# Altium PCB MasterBoardv2.PcbDoc (part 1 of 2)
Units mil, origin at the board's own origin, x right, y up, seen from the top; angles counter-clockwise.
Board outline 13400 x 7290 mil, 2 copper layers (Top Layer, Bottom Layer); 333 components, 276 nets, 860 pads, 107 vias.
Unrouted connection lines stored in the file: 191.
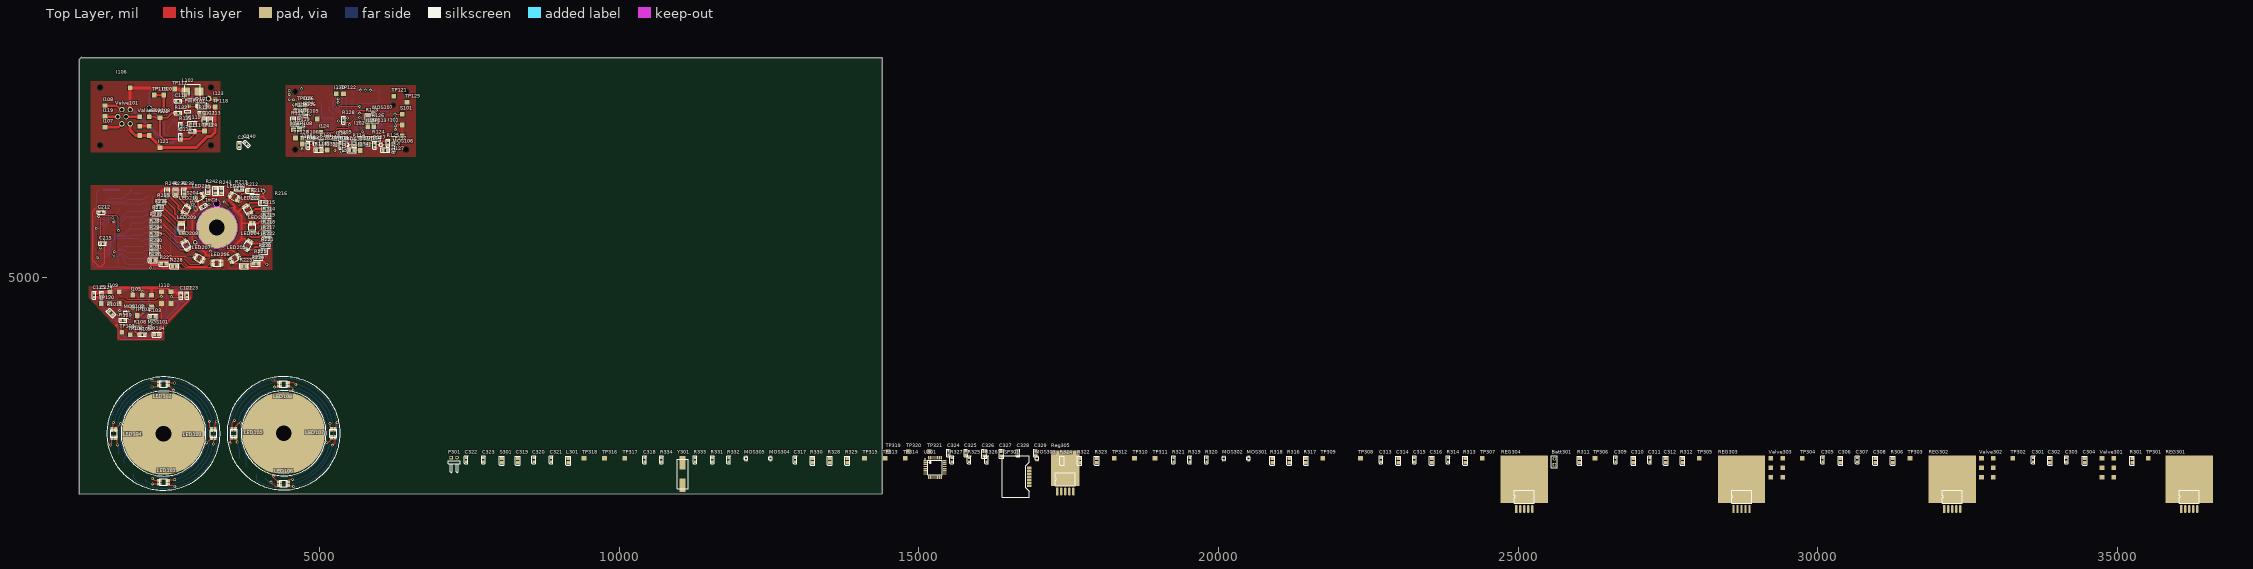
[diagram p0: Top Layer view]
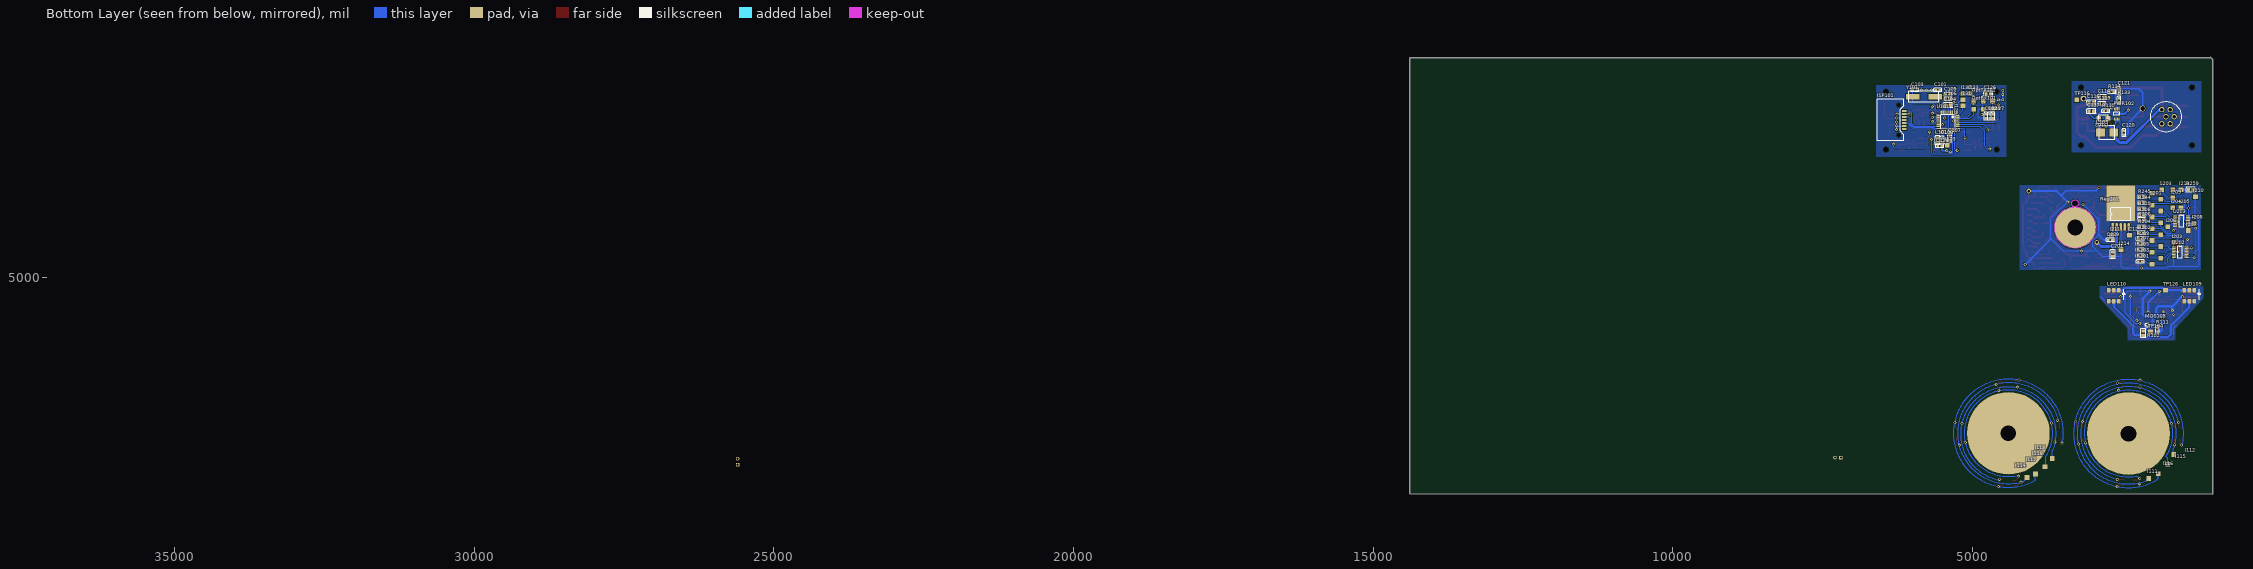
[diagram p1: Bottom Layer view, seen from below]

## Layer stack, top to bottom
Top Layer: signal copper 1.4
Dielectric: dielectric 12.6, FR-4, Dk 4.8
Bottom Layer: signal copper 1.4

## Board outline
990,1380 990,8630 1030,8670 1035,8665 14390,8665 14390,1385

## Design rules (kind name [scope] priority, off if disabled: settings)
Clearance [All] p1: gap=10
ComponentClearance [All] p1 off: gap=10 collisioncheckmode=3 verticalgap=10 showdistances=FALSE
HoleSize [All] p1: absolutevalues=TRUE maxlimit=260 minlimit=1 maxpercent=80.000 minpercent=20.000
MinimumSolderMaskSliver [All] p1: minsoldermaskwidth=2.5
PasteMaskExpansion [All] p1 off: expansion=0
PlaneClearance [All] p1: clearance=39.37
PlaneConnect [All] p1: planeconnectstyle=Relief reliefexpansion=20 reliefentries=4 reliefconductorwidth=10 reliefairgap=20
PolygonConnect [All] p1: connectstyle=Relief reliefconductorwidth=10 reliefentries=4 polygonreliefangle="90 Angle"
RoomDefinition Glasses-LEDBoard [InComponentClass('Glasses-LEDBoard')] p1: confinementstyle=ConfineIn formatcopy=TRUE lockcomponents=FALSE outline 1095,3870 2960,3870 2960,4915 1095,4915
RoomDefinition Glasses-LensBoard [InComponentClass('Glasses-LensBoard')] p2: confinementstyle=ConfineIn formatcopy=TRUE lockcomponents=FALSE outline 1415,1415 5395,1415 5395,3385 1415,3385
RoomDefinition Valve [InComponentClass('Valve')] p3: confinementstyle=ConfineIn formatcopy=TRUE lockcomponents=FALSE outline 14785,9200 17190,9200 17190,9720 14785,9720
RoomDefinition Glasses-PSUBoard [InComponentClass('Glasses-PSUBoard')] p4: confinementstyle=ConfineIn formatcopy=TRUE lockcomponents=FALSE outline 1160,7025 3485,7025 3485,8290 1160,8290
RoomDefinition Glasses [InComponentClass('Glasses')] p5: confinementstyle=ConfineIn formatcopy=TRUE lockcomponents=FALSE outline 4400,6970 6645,6970 6645,8235 4400,8235
RoomDefinition Controller-IOBoard [InComponentClass('Controller-IOBoard')] p6: confinementstyle=ConfineIn formatcopy=TRUE lockcomponents=FALSE outline 1110,5045 4255,5045 4255,6590 1110,6590
RoomDefinition Controller [InComponentClass('Controller')] p7: confinementstyle=ConfineIn formatcopy=TRUE lockcomponents=FALSE outline 7880,3790 11575,3790 11575,7105 7880,7105
RoomDefinition Charger [InComponentClass('Charger')] p8: confinementstyle=ConfineIn formatcopy=TRUE lockcomponents=FALSE outline 7135,1050 36605,1050 36605,2130 7135,2130
RoutingVias [All] p1: holewidth=28 width=50 viastyle="Through Hole" minholewidth=20 minwidth=40 maxholewidth=260 maxwidth=300
SilkToSilkClearance [All] p1 off: silktosilkclearance=10
SilkscreenOverComponentPads [All] p1 off: minsilkscreentomaskgap=10
SolderMaskExpansion [All] p1: expansion=4
Width [All] p1: maxlimit=118.11 minlimit=10 preferedwidth=20
20 further rules are at their usual default settings.

## Classes and differential pairs
component class Charger: Batt301 C301 C302 C303 C304 C305 C306 C307 C308 C309 C310 C311 C312 C313 C314 C315 C316 C317 C318 C319 C320 C321 C322 C323 C324 C325 C326 C327 C328 C329 ISP301 L301 MOS301 MOS302 MOS303 MOS304 MOS305 P301 R301 R306 R311 R312 R313 R314 R316 R317 R318 R319 R320 R321 R322 R323 R324 R325 R326 R327 R328 R329 R330 R331 R332 R333 R334 REG301 REG302 REG303 REG304 Reg305 S301 TP301 TP302 TP303 TP304 TP305 TP306 TP307 TP308 TP309 TP310 TP311 TP312 TP313 TP314 TP315 TP316 TP317 TP318 TP319 TP320 TP321 U301 Valve301 Valve302 Valve303 Y301
component class Controller: Batt201 BT201 C203 C204 C205 C206 C207 C208 C209 C210 C211 C213 C214 C216 C217 C218 C219 C220 C221 C222 C223 C224 C225 C226 C227 C228 C229 C230 C231 C232 C233 C234 C235 C236 C237 C238 C240 C241 C242 C243 D201 EL201 I201 I202 ISP201 L201 L202 L203 L204 MOS201 MOS202 MOS203 MOS204 MOS205 MOS206 Opt_Rx_201 Opt_Tx_201 R246 R247 R248 R249 R250 R251 R252 R253 R254 R255 R256 R257 R258 R260 R261 R262 R263a R263b R264 R265 R266 R267 R268 R269 R270 R271 R272 R273 Reg202 S202 T201 TP209 TP210 TP211 TP212 TP213 TP214 TP215 TP216 TP217 TP218 TP219 TP220 TP221 TP222 TP223 TP224 TP225 TP226 TP227 TP228 U201 U204 U205 U206 U207 Valve201 Valve202 Y201
component class Glasses: C101 C102 C103 C104 C105 C106 C107 C108 C109 C126 C127 C128 I101 I102 I103 I104 I124 I125 I126 I127 I128 I129 I130 I131 I132 I133 I134 I135 I136 I137 I? ISP101 L101 MOS103 MOS104 MOS105 MOS106 MOS107 OptRx101 OptTx101 R105 R106 R107 R112 R113 R114 R115 R116 R118 R119 R120 R121 R122 R123 R124 R125 R126 R127 R128 S101 TP105 TP106 TP107 TP108 TP109 TP110 TP112 TP113 TP114 TP121 TP122 TP123 TP125 U101 Y101
component class Valve: BTValve401 LED401 LED402 Valve401 Valve402
component class Controller-IOBoard: C201 C202 C212 C215 C239 I203 I204 I205 I206 I207 I208 I209 I210 I211 I212 I213 I214 LED201 LED202 LED203 LED204 LED205 LED206 LED207 LED208 LED209 LED210 LED211 R201 R202 R203 R204 R205 R206 R207 R208 R209 R210 R211 R212 R213 R214 R215 R216 R217 R218 R219 R220 R221 R222 R223 R224 R225 R226 R227 R228 R229 R230 R231 R232 R233 R234 R235 R236 R237 R238 R239 R240 R241 R242 R243 R244 R245 R259 Reg201 S201 S203 S204 TP201 TP203 TP204 TP205 TP206 TP207 TP208 U202 U203
component class Glasses-LEDBoard: C122 C123 C124 C125 I105 I109 I110 LED109 LED110 MOS101 MOS102 MOS108 R101 R102 R103 R104 R108 R109 R110 R111 TP101 TP102 TP103 TP104 TP120 TP126
component class Glasses-PSUBoard: C110 C111 C112 C113 C114 C115 C116 C117 C118 C119 C120 C121 D101 D102 I106 I107 I108 I119 I120 I121 I122 I123 L102 L103 PWR101 PWR102 R129 R130 R131 R132 R133 R134 TP116 TP117 TP118 TP119 TP124 Valve101 Valve102 Valve103
component class Glasses-LensBoard: I111 I112 I113 I114 I115 I116 I117 I118 LED101 LED102 LED103 LED104 LED105 LED106 LED107 LED108

## Components (designator, comment, footprint, x,y, rotation, side; value= is the part's Value field where it differs from the comment)
Batt301 "BaseBankSocket" HDR1X2 25605,1870 r90 top
C101 "18pf" 0603 5580,8120 r180 bottom
C102 "100nf" 0603 4775,7685 r270 bottom
C103 "18pf" 0603 5960,8120 r0 bottom
C104 "10uf" 0805 5410,7870 r0 bottom
C105 "1uf" 0603 5410,8050 r0 bottom
C106 "100nf" 0603 5410,7970 r0 bottom
C107 "100nf" 0603 5380,7320 r270 bottom
C108 "100nf" 0603 5505,7285 r90 bottom
C109 "100nf" 0603 4715,7685 r270 bottom
C110 "10uf" 0805 2880,7560 r180 top
C111 "1uf" 0603 2880,7440 r180 top
C112 "10uf" 0805 3080,7600 r90 top
C113 "10uf" 0805 3180,7600 r90 top
C114 "10uf" 0805 2840,8000 r180 bottom
C115 "1uf" 0603 2840,7900 r180 bottom
C116 "10uf" 0805 3015,7910 r0 bottom
C117 "10uf" 0805 3015,7770 r0 bottom
C118 "100nf" 0603 2640,7940 r0 top
C119 "2.2nf" 0603 2680,7340 r90 top
C120 "100nf" 0603 2475,7410 r90 bottom
C121 "2.2nf" 0603 2555,8110 r270 bottom
C122 "1uf" 0603 2690,4695 r90 top
C123 "100nf" 0603 2790,4695 r90 top
C124 "1uf" 0603 1360,4700 r90 top
C125 "100nf" 0603 1240,4700 r90 top
C126 "10uf" 0805 4740,8060 r0 bottom
C127 "1uf" 0603 4655,7685 r270 bottom
C128 "100nf" 0603 5545,7185 r0 bottom
C201 "10uf" 0805 2660,5380 r90 bottom
C202 "1uf" 0603 3060,6180 r210 top
C212 "1uf" 0603 1360,6080 r180 top
C215 "1uf" 0603 1380,5560 r0 top
C239 "100nf" 0603 2700,5620 r0 bottom
C240 "100nf" 0603 3780,7220 r315 top
C241 "10uf" 0603 3660,7200 r270 top
C301 "1uf" 0603 33595,1955 r90 top
C302 "10uf" 0805 33875,1940 r90 top
C303 "1uf" 0603 34150,1955 r90 top
C304 "10uf" 0805 34455,1940 r90 top
C305 "1uf" 0603 30080,1955 r90 top
C306 "10uf" 0805 30380,1940 r90 top
C307 "1uf" 0603 30660,1955 r90 top
C308 "10uf" 0805 30960,1940 r90 top
C309 "1uf" 0603 26625,1955 r90 top
C310 "10uf" 0805 26925,1940 r90 top
C311 "1uf" 0603 27195,1955 r90 top
C312 "10uf" 0805 27465,1940 r90 top
C313 "1uf" 0603 22710,1955 r90 top
C314 "10uf" 0805 23000,1940 r90 top
C315 "1uf" 0603 23270,1955 r90 top
C316 "10uf" 0805 23560,1940 r90 top
C317 "18pf" 0603 12935,1955 r90 top
C318 "18pf" 0603 10425,1955 r90 top
C319 "10uf" 0805 8310,1940 r90 top
C320 "1uf" 0603 8575,1955 r90 top
C321 "100nf" 0603 8865,1955 r90 top
C322 "100nf" 0603 7445,1955 r90 top
C323 "100nf" 0603 7735,1955 r90 top
C324 "100nf" 0603 15495,2065 r90 top
C325 "1uf" 0603 15785,2065 r90 top
C326 "10uf" 0805 16090,2050 r90 top
C327 "10uf" 0805 16380,2050 r90 top
C328 "1uf" 0603 16655,2065 r90 top
C329 "100nf" 0603 16945,2065 r90 top
D101 "Diode BYG20D" BYG20J-E3 3120,7860 r180 top
D102 "Diode BYG20D" BYG20J-E3 2895,7650 r180 bottom
I101 "TestPoint" TestPoint 6380,7360 r90 top
I102 "TestPoint" TestPoint 5810,7315 r90 top
I103 "TestPoint" TestPoint 5420,7200 r90 bottom
I104 "TestPoint" TestPoint 4960,7640 r90 top
I105 "LensesPCBA" "Valve male" 2040,4500 r0 top
I106 "TestPoint" TestPoint 1840,8160 r90 top
I107 "TestPoint" TestPoint 1420,7500 r0 top
I108 "TestPoint" TestPoint 1420,7860 r0 top
I109 "Lenses PCB Left" "4-Pin Pad" 1660,4560 r0 top
I110 "Lenses PCB Right" "4-Pin Pad" 2520,4560 r0 top
I111 "TestPoint" TestPoint 2060,1640 r90 bottom
I112 "TestPoint" TestPoint 1640,2040 r90 bottom
I113 "TestPoint" TestPoint 3670,1975 r270 bottom
I114 "TestPoint" TestPoint 4090,1655 r270 bottom
I115 "TestPoint" TestPoint 1740,1880 r90 bottom
I116 "TestPoint" TestPoint 1900,1720 r90 bottom
I117 "TestPoint" TestPoint 3950,1715 r270 bottom
I118 "TestPoint" TestPoint 3790,1835 r270 bottom
I119 "TestPoint" TestPoint 1420,7680 r0 top
I120 "TestPoint" TestPoint 2400,8040 r90 top
I121 "TestPoint" TestPoint 2340,7160 r90 top
I122 "TestPoint" TestPoint 2340,7660 r90 top
I123 "TestPoint" TestPoint 3260,7960 r90 top
I124 "TestPoint" TestPoint 5020,7420 r0 top
I125 "TestPoint" TestPoint 4710,7320 r0 top
I126 "TestPoint" TestPoint 4765,7880 r270 top
I127 "TestPoint" TestPoint 6240,7120 r0 top
I128 "TestPoint" TestPoint 5805,7510 r90 top
I129 "TestPoint" TestPoint 5160,7860 r180 bottom
I130 "TestPoint" TestPoint 5280,8060 r0 top
I131 "TestPoint" TestPoint 5160,7960 r180 bottom
I132 "TestPoint" TestPoint 5160,8060 r180 bottom
I133 "TestPoint" TestPoint 5040,8060 r180 bottom
I134 "TestPoint" TestPoint 5680,7115 r0 top
I135 "TestPoint" TestPoint 5130,7120 r0 top
I136 "TestPoint" TestPoint 5260,7315 r0 top
I137 "TestPoint" TestPoint 4565,7460 r270 top
I203 "TestPoint" TestPoint 1640,5580 r270 bottom
I204 "TestPoint" TestPoint 1660,6160 r270 bottom
I205 "TestPoint" TestPoint 1520,6160 r90 bottom
I206 "TestPoint" TestPoint 1740,5840 r90 bottom
I207 "TestPoint" TestPoint 1400,5780 r90 bottom
I208 "TestPoint" TestPoint 1300,5900 r90 bottom
I209 "TestPoint" TestPoint 1660,6320 r90 bottom
I210 "TestPoint" TestPoint 1280,6340 r90 bottom
I211 "TestPoint" TestPoint 2680,5700 r90 bottom
I212 "TestPoint" TestPoint 2380,5700 r90 bottom
I213 "TestPoint" TestPoint 1520,6460 r90 bottom
I214 "TestPoint" TestPoint 2520,5460 r90 bottom
ISP101 "SATA" SATA 6140,7620 r90 bottom
ISP301 "SATA" SATA 16845,1670 r90 top
L101 "10uH" 0805 5585,7285 r270 bottom
L102 "ELL-6PG4R7N" ELL6PG4R7N-2CHK 2880,8100 r0 top
L103 "ELL-6PG4R7N" ELL6PG4R7N-2CHK 2755,7410 r0 bottom
L301 "10uH" 0805 9150,1940 r90 top
LED101 "Tri LED" CLV1A-FKB 2396.34,1580 r0 top
LED102 "Tri LED" CLV1A-FKB 2396.34,3220 r180 top
LED103 "Tri LED" CLV1A-FKB 3230,2390 r90 top
LED104 "Tri LED" CLV1A-FKB 1570,2390 r270 top
LED105 "Tri LED" CLV1A-FKB 3570,2395 r90 top
LED106 "Tri LED" CLV1A-FKB 4401.34,1555 r180 top
LED107 "Tri LED" CLV1A-FKB 5230,2395 r270 top
LED108 "Tri LED" CLV1A-FKB 4401.34,3215 r0 top
LED109 "LED_head" "LED Headlamp" 1385,4690 r270 bottom
LED110 "LED_head" "LED Headlamp" 2645,4690 r270 bottom
LED201 "Tri LED" CLV1A-FKB 3580,6340 r330 top
LED202 "Tri LED" CLV1A-FKB 3799.21,6122.05 r300 top
LED203 "Tri LED" CLV1A-FKB 3877.95,5826.77 r270 top
LED204 "Tri LED" CLV1A-FKB 3799.21,5531.5 r240 top
LED205 "Tri LED" CLV1A-FKB 3582.68,5314.96 r210 top
LED206 "Tri LED" CLV1A-FKB 3287.4,5236.22 r180 top
LED207 "Tri LED" CLV1A-FKB 2992.13,5314.96 r150 top
LED208 "Tri LED" CLV1A-FKB 2775.59,5531.5 r120 top
LED209 "Tri LED" CLV1A-FKB 2696.85,5826.77 r90 top
LED210 "Tri LED" CLV1A-FKB 2775.59,6122.05 r60 top
LED211 "Tri LED" CLV1A-FKB 2992.13,6338.58 r30 top
MOS101 "EM6K7T2RCT-ND" EM6K7T2R-EMT6 2140,4180 r0 top
MOS102 "EM6K7T2RCT-ND" EM6K7T2R-EMT6 1780,4440 r270 top
MOS103 "EM6K7T2RCT-ND" EM6K7T2R-EMT6 4890,7240 r0 top
MOS104 "EM6K7T2RCT-ND" EM6K7T2R-EMT6 5500,7195 r180 top
MOS105 "EM6K7T2RCT-ND" EM6K7T2R-EMT6 4685,7700 r270 top
MOS106 "EM6K7T2RCT-ND" EM6K7T2R-EMT6 5990,7235 r0 top
MOS107 "EM6K7T2RCT-ND" EM6K7T2R-EMT6 5885,7690 r90 top
MOS108 "EM6K7T2RCT-ND" EM6K7T2R-EMT6 2110,4165 r90 bottom
MOS301 "EM6K7T2RCT-ND" EM6K7T2R-EMT6 20480,1940 r90 top
MOS302 "EM6K7T2RCT-ND" EM6K7T2R-EMT6 20070,1940 r90 top
MOS303 "EM6K7T2RCT-ND" EM6K7T2R-EMT6 16950,1940 r90 top
MOS304 "EM6K7T2RCT-ND" EM6K7T2R-EMT6 12505,1940 r90 top
MOS305 "EM6K7T2RCT-ND" EM6K7T2R-EMT6 12095,1940 r90 top
OptRx101 "TORX177" "Optical RX" 4980,7800 r180 bottom
OptTx101 "LTDL-TX12P03" "Optical TX" 4980,7940 r180 bottom
P301 "9VDC Input" HDR1X2H 7195,1990 r0 top
PWR101 "TPS61085PWR" TPS61085-MSOP8 2760,7680 r90 top
PWR102 "TPS61085PWR" TPS61085-MSOP8 2555,7810 r270 bottom
R101 "Res3" 0805 1520,4400 r315 top
R102 "Res3" 0805 2150,4065 r270 bottom
R103 "Res3" 0805 2220,4340 r180 top
R104 "Res3" 0805 2280,4040 r180 top
R105 "Res3" 0805 5400,7315 r0 top
R106 "Res3" 0805 4850,7320 r0 top
R107 "Res3" 0805 5540,7115 r180 top
R108 "10k" 0603 1960,4160 r0 top
R109 "10k" 0603 2040,4040 r0 top
R110 "10k" 0603 1720,4280 r180 top
R111 "10k" 0603 1910,4125 r90 bottom
R112 "10k" 0603 5360,7195 r90 top
R113 "10k" 0603 4810,7200 r90 top
R114 "10k" 0603 5580,7235 r270 top
R115 "Res3" 0805 4560,7600 r90 top
R116 "Res3" 0805 4765,7740 r270 top
R118 "Res3" 0805 4990,7120 r180 top
R119 "10k" 0603 4685,7540 r180 top
R120 "10k" 0603 4645,7780 r0 top
R121 "10k" 0603 5030,7240 r270 top
R122 "Res3" 0805 6100,7120 r180 top
R123 "Res3" 0805 5805,7650 r90 top
R124 "Res3" 0805 5950,7315 r0 top
R125 "10k" 0603 6140,7240 r270 top
R126 "10k" 0603 5925,7610 r180 top
R127 "10k" 0603 5920,7200 r90 top
R128 "10k" 0603 5400,7620 r90 top
R129 "54.9k" 0603 3040,7740 r0 top
R130 "54.9k" 0603 2775,7770 r0 bottom
R131 "22K" 0603 2680,7520 r90 top
R132 "18K" 0603 2640,7740 r0 top
R133 "22k" 0603 2555,7950 r270 bottom
R134 "18k" 0603 2675,8090 r180 bottom
R201 "10k" 0603 2200,5260 r0 bottom
R202 "10k" 0603 2180,5740 r180 bottom
R203 "10k" 0603 2200,5360 r0 bottom
R204 "10k" 0603 2180,5840 r180 bottom
R205 "10k" 0603 2200,5460 r0 bottom
R206 "10k" 0603 2180,5960 r180 bottom
R207 "10k" 0603 2200,5560 r0 bottom
R208 "10k" 0603 2180,6040 r180 bottom
R209 "10k" 0603 2200,5640 r0 bottom
R210 "10k" 0603 2180,6140 r180 bottom
R211 "Res1" 0805 3920,6340 r180 top
R212 "Res1" 0805 3840,6440 r180 top
R213 "Res1" 0805 3660,6480 r180 top
R214 "Res1" 0805 4120,6035 r180 top
R215 "Res1" 0805 4120,6137.5 r180 top
R216 "Res1" 0805 4060,6240 r180 top
R217 "Res1" 0805 4120,5720 r180 top
R218 "Res1" 0805 4120,5820 r180 top
R219 "Res1" 0805 4120,5932.5 r180 top
R220 "Res1" 0805 4060,5420 r180 top
R221 "Res1" 0805 4100,5520 r180 top
R222 "Res1" 0805 4120,5625 r180 top
R223 "Res1" 0805 3740,5180 r180 top
R224 "Res1" 0805 3940,5220 r180 top
R225 "Res1" 0805 3980,5320 r180 top
R226 "Res1" 0805 2220,5280 r0 top
R227 "Res1" 0805 2400,5220 r0 top
R228 "Res1" 0805 2580,5180 r0 top
R229 "Res1" 0805 2240,5617.5 r0 top
R230 "Res1" 0805 2240,5508.75 r0 top
R231 "Res1" 0805 2240,5400 r0 top
R232 "Res1" 0805 2240,5943.75 r0 top
R233 "Res1" 0805 2240,5835 r0 top
R234 "Res1" 0805 2240,5726.25 r0 top
R235 "Res1" 0805 2360,6260 r0 top
R236 "Res1" 0805 2320,6160 r0 top
R237 "Res1" 0805 2280,6060 r0 top
R238 "Res1" 0805 2740,6420 r270 top
R239 "Res1" 0805 2600,6420 r270 top
R240 "Res1" 0805 2460,6420 r270 top
R241 "Res1" 0805 3260,6440 r270 top
R242 "Res1" 0805 3140,6460 r270 top
R243 "Res1" 0805 3360,6440 r270 top
R244 "10k" 0603 2180,6240 r180 bottom
R245 "10k" 0603 2180,6340 r0 bottom
R259 "Res1" 0805 1360,6460 r180 bottom
R301 "3R" 0805 35245,1940 r90 top
R306 "3R" 0805 31250,1940 r90 top
R311 "Res3" 0805 26025,1940 r90 top
R312 "3R" 0805 27745,1940 r90 top
R313 "Res3" 0805 24120,1940 r90 top
R314 "3R" 0603 23830,1955 r90 top
R316 "Res3" 0805 21180,1940 r90 top
R317 "Res3" 0805 21460,1940 r90 top
R318 "Res3" 0805 20900,1940 r90 top
R319 "10k" 0603 19520,1955 r90 top
R320 "10k" 0603 19800,1955 r90 top
R321 "10k" 0603 19250,1955 r90 top
R322 "Res3" 0805 17680,1940 r90 top
R323 "Res3" 0805 17970,1940 r90 top
R324 "Res3" 0805 17390,1940 r90 top
R325 "10k" 0603 15840,1955 r90 top
R326 "10k" 0603 16130,1955 r90 top
R327 "10k" 0603 15550,1955 r90 top
R328 "Res3" 0805 13515,1940 r90 top
R329 "Res3" 0805 13805,1940 r90 top
R330 "Res3" 0805 13225,1940 r90 top
R331 "10k" 0603 11555,1955 r90 top
R332 "10k" 0603 11825,1955 r90 top
R333 "10k" 0603 11265,1955 r90 top
R334 "10k" 0603 10705,1955 r90 top
Reg201 "Reg104-5" REG104-5-DDPAK5 2660,5840 r90 bottom
REG301 "TPS7A4501DCQR" TPS7A4501KTTR-5DDPAK 36065,1130 r90 top
REG302 "TPS7A4501DCQR" TPS7A4501KTTR-5DDPAK 32110,1130 r90 top
REG303 "TPS7A4501DCQR" TPS7A4501KTTR-5DDPAK 28595,1130 r90 top
REG304 "TPS7A4501KTTR" TPS7A4501KTTR-5DDPAK 24970,1130 r90 top
Reg305 "Reg104-5" REG104-5-DDPAK5 17310,1420 r90 top
S101 "SW-PB" "2 pin switch (surface mount)" 6380,7720 r270 top
S201 "SW-12WAY" "switch pad layout" 1860,6300 r0 bottom
S203 "SW-SPST" "2 pin switch (surface mount)" 1840,6460 r180 bottom
S204 "SW-12WAY" "12 pole switch" 3287.4,5826.77 r0 top
S301 "SW-PB" 0805 8040,1940 r90 top
TP101 "TestPoint" TestPoint 1960,4360 r90 top
TP102 "TestPoint" TestPoint 1840,4040 r90 top
TP103 "TestPoint" TestPoint 1700,4080 r90 top
TP104 "TestPoint" TestPoint 2030,4085 r270 bottom
TP105 "TestPoint" TestPoint 5260,7215 r90 top
TP106 "TestPoint" TestPoint 4710,7220 r90 top
TP107 "TestPoint" TestPoint 5680,7215 r90 top
TP108 "TestPoint" TestPoint 4665,7460 r0 top
TP109 "TestPoint" TestPoint 4665,7880 r0 top
TP110 "TestPoint" TestPoint 5130,7235 r90 top
TP112 "TestPoint" TestPoint 6240,7220 r90 top
TP113 "TestPoint" TestPoint 5905,7510 r180 top
TP114 "TestPoint" TestPoint 5810,7215 r90 top
TP116 "TestPoint" TestPoint 3260,7960 r90 bottom
TP117 "TestPoint" TestPoint 2580,8140 r90 top
TP118 "TestPoint" TestPoint 3260,7840 r90 top
TP119 "TestPoint" TestPoint 2240,8040 r90 top
TP120 "TestPoint" TestPoint 1360,4560 r90 top
TP121 "TestPoint" TestPoint 6240,8020 r90 top
TP122 "TestPoint" TestPoint 5400,8060 r90 top
TP123 "TestPoint" TestPoint 4600,7320 r90 top
TP124 "TestPoint" TestPoint 3080,7440 r90 top
TP125 "TestPoint" TestPoint 6460,7920 r90 top
TP126 "TestPoint" TestPoint 1780,4782.52 r90 bottom
TP301 "TestPoint" TestPoint 35515,1980 r90 top
TP302 "TestPoint" TestPoint 33255,1980 r90 top
TP303 "TestPoint" TestPoint 31540,1980 r90 top
TP304 "TestPoint" TestPoint 29740,1980 r90 top
TP305 "TestPoint" TestPoint 28025,1980 r90 top
TP306 "TestPoint" TestPoint 26285,1980 r90 top
TP307 "TestPoint" TestPoint 24400,1980 r90 top
TP308 "TestPoint" TestPoint 22370,1980 r90 top
TP309 "TestPoint" TestPoint 21740,1980 r90 top
TP310 "TestPoint" TestPoint 18600,1980 r90 top
TP311 "TestPoint" TestPoint 18940,1980 r90 top
TP312 "TestPoint" TestPoint 18260,1980 r90 top
TP313 "TestPoint" TestPoint 14435,1980 r90 top
TP314 "TestPoint" TestPoint 14775,1980 r90 top
TP315 "TestPoint" TestPoint 14095,1980 r90 top
TP316 "TestPoint" TestPoint 9755,1980 r90 top
TP317 "TestPoint" TestPoint 10095,1980 r90 top
TP318 "TestPoint" TestPoint 9415,1980 r90 top
TP319 "TestPoint" TestPoint 14485,2090 r90 top
TP320 "TestPoint" TestPoint 14825,2090 r90 top
TP321 "TestPoint" TestPoint 15175,2090 r90 top
U101 "ATmega8L-8AI" ATMega_GOOD 5410,7590 r270 bottom
U202 "FSAL200" FSAL200-16QSOP 1640,5500 r180 bottom
U203 "FSAL200" FSAL200-16QSOP 1620,6020 r180 bottom
U301 "ATmega8L-8AI" ATMega_GOOD 15270,1825 r0 top
Valve101 "Valve_pcb connector" "Valve_pcb mount" 1771.65,7677.17 r90 top
Valve102 "Header 3H" "Valve_3 pin" 2000,7520 r270 top
Valve103 "Header 3H" "Valve_3 pin" 2160,7520 r270 top
Valve301 "6+SHIELD DIN" "Valve male" 34940,1820 r90 top
Valve302 "6+SHIELD DIN" "Valve male" 32930,1820 r90 top
Valve303 "6+SHIELD DIN" "Valve male" 29415,1820 r90 top
Y101 "XTAL" ABLS-16MHz-B4-T 5810,8010 r0 bottom
Y301 "XTAL" ABLS-16MHz-B4-T 11060,1715 r90 top

## Footprints (in the part's own frame and the unit in brackets; to place one, negate y for a bottom-side part, rotate by r counter-clockwise, add the part's x,y. Pads: shape width x height; smd on the part's side, far side on the other; paste and mask are expansions set on the pad)
"2 pin switch (surface mount)" [mm]
  rect 2x2 smd: 1(0,0) 2(4.6,0)
"4-Pin Pad" [mm]
  rect 2x2 smd: 1(-4,5) 2(0,5) 3(-4,0) 4(0,0)
"12 pole switch" [mm] "rotary switch"
  round 17.5 hole 6.604 unplated: 0(0,0.05)
  round 3.175 hole 3.175 unplated: 0(0,10.25)
  Keep-Out Layer circle w0.254: c0,10.25 r1.5
  Keep-Out Layer circle w0.254: c0,0 r8.75
0603 [mm] "generic 0603 Cap/Res"
  rect 1.1x1 smd: 1(-0.85,0) 2(0.85,0)
  silkscreen extent -1.65,-0.76 1.65,0.76
0805 [mm] "generic 0805 Cap/Res"
  rect 1.3x1.5 smd: 1(-0.95,0) 2(0.95,0)
  silkscreen extent -1.91,-1.02 1.91,1.02
ABLS-16MHz-B4-T [mm] "Abracon ABLS Series 16MHz 18pF Crystal"
  rect 5.8x2.5 smd: 1(-4.75,0) 2(4.75,0)
  silkscreen extent -6.35,-2.35 6.35,2.35
ATMega_GOOD [mm]
  oval 1.5x0.5 smd: 1(-4.15,2.8) 2(-4.15,2) 3(-4.15,1.2) 4(-4.15,0.4) 5(-4.15,-0.4) 6(-4.15,-1.2) 7(-4.15,-2) 8(-4.15,-2.8) 17(4.15,-2.8) 18(4.15,-2) 19(4.15,-1.2) 20(4.15,-0.4) 21(4.15,0.4) 22(4.15,1.2) 23(4.15,2) 24(4.15,2.8)
  oval 0.5x1.5 smd: 9(-2.8,-4.15) 10(-2,-4.15) 11(-1.2,-4.15) 12(-0.4,-4.15) 13(0.4,-4.15) 14(1.2,-4.15) 15(2,-4.15) 16(2.8,-4.15) 25(2.8,4.15) 26(2,4.15) 27(1.2,4.15) 28(0.4,4.15) 29(-0.4,4.15) 30(-1.2,4.15) 31(-2,4.15) 32(-2.8,4.15)
  silkscreen extent -4.27,-3.05 3.05,3.75, body extent -3.5,-3.5 3.5,3.5, height 1.2
BYG20J-E3 [mm]
  rrect50% 2x2 smd: 1(0,0)
  rect 2x2 smd: 3(4,0)
  silkscreen extent -0.04,-1.25 4,1.6
CLV1A-FKB [mm] "Cree RGB SMD LED"
  rrect50% 2x1.3 smd: 1(-1.75,0.75)
  rect 2x1.3 smd: 2(-1.75,-0.75) 3(1.75,-0.75) 4(1.75,0.75)
  silkscreen extent -1.6,-1.4 1.6,1.4
ELL6PG4R7N-2CHK [mm] "Panasonic ELL-6UH100M Inductor 10uH"
  rect 3.8x3.4 smd: 1(-2.85,0) 2(2.85,0)
  silkscreen extent -3.2,-3 3.2,3
EM6K7T2R-EMT6 [mil] "Rohm Dual Channel NMOS"
  rect 27.56x10 smd mask+0: 1(0,0)
  oval 27.56x10 smd mask+0: 2(0,-20) 3(0,-40) 4(66.93,-40) 5(66.93,-20) 6(66.93,0)
  silkscreen extent 12,-49 59,10
FSAL200-16QSOP [mm]
  rect 1.7x0.317 smd: 1(0,0)
  oval 1.7x0.317 smd: 2(0,-0.635) 3(0,-1.27) 4(0,-1.905) 5(0,-2.54) 6(0,-3.175) 7(0,-3.81) 8(0,-4.445) 9(5.4,-4.445) 10(5.4,-3.81) 11(5.4,-3.175) 12(5.4,-2.54) 13(5.4,-1.905) 14(5.4,-1.27) 15(5.4,-0.635) 16(5.4,0)
  silkscreen extent 1.73,-4.76 3.67,0.32
HDR1X2 [mm] "Connector; Header; 2 Position"
  rect 1.5x1.5 hole 0.9: 1(0,0)
  round 1.5 hole 0.9: 2(2.54,0)
  silkscreen extent -1.27,-1.27 3.81,1.27
HDR1X2H [mm] "Connector; Header; 2 Position; Right Angle"
  rect 1.5x1.5 hole 0.9: 1(0,0)
  round 1.5 hole 0.9: 2(2.54,0)
  silkscreen extent -1.27,-6.35 3.81,-1.27
"LED Headlamp" [mm]
  rect 2x1.5 smd: 1(-2.35,-2.1) 1(-2.35,0) 1(-2.35,2.1) 2(2.35,-2.1) 2(2.35,0) 2(2.35,2.1)
  silkscreen extent -2.67,3.68 1.65,4.83
"Optical RX" [mm]
  rect 2x2 smd: 1(0,0) 2(4,0) 3(8,0)
"Optical TX" [mm]
  rect 2x2 smd: 1(0,0) 2(4,0) 3(8,0)
REG104-5-DDPAK5 [mm]
  rect 3.4x1 smd: 1(0,0)
  oval 3.4x1 smd: 2(0,-1.7) 3(0,-3.4) 4(0,-5.1) 5(0,-6.8)
  rect 15x12 smd: 6(10,-3.4)
  silkscreen extent 2.53,-7.65 8.07,0.85
SATA [mm]
  round 0 hole 1.524 unplated: 0(-6.375,2.362) 0(6.375,2.362)
  rect 0.9x2 smd: 1(3.81,0) 2(2.54,0) 3(1.27,0) 4(0,0) 5(-1.27,0) 6(-2.54,0) 7(-3.81,0)
  silkscreen extent -8.8,0.1 8.8,11.5
"switch pad layout" [mm]
  rect 2x2 smd: 1(3.7,27.5) 2(0,25) 3(3.7,22.5) 5(0,20) 6(3.7,17.5) 7(0,15) 8(3.7,12.5) 9(0,10) 10(3.7,7.5) 11(0,5) 12(3.7,2.5) 13(0,0) 14(3.7,-2.5)
TestPoint [mm]
  rect 2x2 smd: 1(0,0)
TPS7A4501KTTR-5DDPAK [mm]
  rect 3.4x1 smd: 1(0,0)
  oval 3.4x1 smd: 2(0,-1.7) 3(0,-3.4) 4(0,-5.1) 5(0,-6.8)
  rect 20x20 smd: 6(12.6,-3.4)
  silkscreen extent 2.53,-7.65 8.07,0.85
TPS61085-MSOP8 [mm] "Ti Step-Up DCDC Converter - MSOP 8 Pin Package"
  rect 1.4x0.38 smd: 1(0,0)
  oval 1.4x0.38 smd: 2(0,-0.65) 3(0,-1.3) 4(0,-1.95) 5(4.35,-1.95) 6(4.35,-1.3) 7(4.35,-0.65) 8(4.35,0)
  silkscreen extent 1.58,-2.28 2.77,0.33
"Valve male" [mm]
  rect 2x2 smd: 1(-4,5) 2(-4,0) 3(0,5) 4(0,0) 5(4,5) 6(4,0)
"Valve_3 pin" [mm] "3 pin connector for half a valve connection"
  rect 2x2 smd: 1(-4,0) 2(0,0) 3(4,0)
"Valve_pcb mount" [mil] "pcb foot print for valve connector mounting"
  round 90 hole 60: 1(-119.29,68.9) 2(-119.29,-68.9) 3(0,137.8) 4(0,0) 5(119.29,68.9) 6(119.29,-68.9)

## Part data
Batt301: library part "Header 2", "Header, 2-Pin"
C101 C102 C103 C104 C105 C106 C107 C108 C109 C110 C111 C112 C113 C114 C115 C116 C117 C118 C119 C120 C121 C122 C123 C124 C125 C126 C127 C128 C201 C202 C212 C215 C239 C240 C241 C301 C302 C303 C304 C305 C306 C307 C308 C309 C310 C311 C312 C313 C314 C315 C316 C317 C318 C319 C320 C321 C322 C323 C324 C325 C326 C327 C328 C329: library part "Cap Semi", "Capacitor (Semiconductor SIM Model)"
D101 D102: library part "Diode 10TQ035", "Schottky Rectifier"
I105 Valve301 Valve302 Valve303: library part "Header 3X2A", "Header, 3-Pin, Dual row"
I109 I110: library part "Header 2X2", "Header, 2-Pin, Dual row"
ISP101 ISP301: library part "Header 3X2", "Header, 3-Pin, Dual row"
L101 L102 L103 L301: library part Inductor, "Inductor"
LED109 LED110: library part LED0, "Typical INFRARED GaAs LED"
OptRx101: "Optical receiver module"
OptTx101: "Optical transmitter"
P301: library part "Header 2H", "Header, 2-Pin, Right Angle"
R101 R102 R103 R104 R105 R106 R107 R115 R116 R118 R122 R123 R124 R211 R212 R213 R214 R215 R216 R217 R218 R219 R220 R221 R222 R223 R224 R225 R226 R227 R228 R229 R230 R231 R232 R233 R234 R235 R236 R237 R238 R239 R240 R241 R242 R243 R259 R311 R313 R316 R317 R318 R322 R323 R324 R328 R329 R330: "Resistor"
R108 R109 R110 R111 R112 R113 R114 R119 R120 R121 R125 R126 R127 R128 R201 R202 R203 R204 R205 R206 R207 R208 R209 R210 R244 R245 R319 R320 R321 R325 R326 R327 R331 R332 R333 R334: library part Res3, "Resistor"
R129 R130 R131 R132 R133 R134 R301 R306 R312 R314: library part Res1, "Resistor"
REG301 REG302 REG303: library part TPS7A4515
REG304: library part TPS7A4501
S101 S301: "Switch"
S201 S204: "12 Way Switch"
S203: "Single-Pole, Single-Throw Switch"
U101 U301: "8-Bit AVR Microcontroller with 8K Bytes of In-System Programmable Flash Memory"
U202 U203: "ST Quad Bi-Directional Logic Switch"
Valve101: library part "Header 3X2H", "Header, 3-Pin, Dual row, Right Angle"
Valve102 Valve103: "Header, 3-Pin, Right Angle"
Y101 Y301: "Crystal Oscillator"

## Free pads (board coordinates)
  round 60 hole 80 unplated: 0(1338.58,7199.09) 0(1338.58,8165.24) 0(3188.98,7199.09) 0(3188.98,8165.24) 0(4593.58,7129.09) 0(4593.58,8095.24) 0(6443.98,7129.09) 0(6443.98,8095.24)
  round 1377.95 hole 260: 0(2396.34,2390) 0(4401.34,2395)

## Via types
v1: diameter 50, hole 28, Top Layer to Bottom Layer, 95 vias
v2: diameter 40, hole 20, Top Layer to Bottom Layer, 8 vias
v3: diameter 80, hole 40, Top Layer to Bottom Layer, 2 vias
v4: diameter 100, hole 80, Top Layer to Bottom Layer, 1 vias
v5: diameter 100, hole 60, Top Layer to Bottom Layer, 1 vias

## Nets (pads, with @x,y where several pads share a name; then routed paths per layer and width w, separated by ;. In a path a pad name is that pad's centre, name@x,y a point inside that pad or via, vN(x,y) a via of type N, cw(c..) or ccw(c..) an arc to the next point about the centre after c; other vN are vias at no path point)
555OSC_201: 
ACOSC_201: 
B_CONTROL_101: I109.4 I110.3 R104.1 | length 1249.5
  Top Layer w15: I109.4@1660,4560 1670,4570 2352.52,4570 I110.3@2362.52,4560
  Top Layer w40: R104.1@2317.4,4040 2317.4,4097.4 2362.52,4142.52 I110.3@2362.52,4560
B_CONTROL_101L: I116.1 LED101.3 LED102.3 LED103.3 LED104.3 | length 5559.6
  Top Layer w20: v1(1515,2200) 1535,2220 LED104.3@1535,2299.29 ; v1(2205,3280) 2225,3260 LED102.3@2304.29,3260 ; LED101.3@2465.24,1550.47 2485.71,1530 2565,1530 v1(2585,1510) ; LED103.3@3260,2490.71 3260,2570 v1(3280,2590)
  Bottom Layer w20: v1@1506.78,2198.23 cw(c2396.34,2390) 1940.99,1602.12 1900,1643.11 I116.1@1900,1720 ; v1(2585,1510) v1@2590,1505
B_CONTROL_101R: I118.1 LED105.3 LED106.3 LED107.3 LED108.3 | length 4740
  Top Layer w10: v1@3660,2570 v1@3680,2570 ; v1@4230,1660 v1@4230,1680 ; 4290,1600 4332.44,1600 LED106.3@4340,1600 ; v1@4565,3110 v1@4565,3130 ; v1(5120,2240) 5120,2235 v1@5140,2235 ; LED107.3@5185,2320 5191.1,2326.1 LED107.3@5200.47,2326.1
  Top Layer w20: LED105.3@3605,2465 3605,2515 v1@3660,2570 ; v1@4230,1660 4290,1600 ; LED108.3@4475,3170 4525,3170 v1@4565,3130 ; v1@5140,2235 5185,2280 LED107.3@5185,2320
  Bottom Layer w10: I118.1@3779.13,1845.87 I118.1@3790,1835
  Bottom Layer w20: I118.1@3779.13,1845.87 3779.13,2013.22 cw(c4401.34,2395) 4262.57,1678.31
  other v1: 4235,1680 3680,2565 4560,3110
B_PWM_101: I132.1 U101.2 | length 424.4
  Bottom Layer w10: I132.1@5165,8060 5215,8060 5240,8035 5240,7841.43 5271.43,7810 5305,7810 5331.26,7783.74 U101.2@5331.26,7753.39
B_PWM_101A: I105.4 MOS101.5 R109.2 TP102.1 | length 1107.1
  Top Layer w10: TP102.1@1840,4040 1895,3985 2030,3985 2073.46,4028.46 R109.2@2073.46,4040 2077.06,4040 2168.78,4131.72 2168.78,4143.78 2185,4160 MOS101.5@2206.93,4160 2285,4160 2310,4185 2310,4385 2295,4400 2180,4400 2080,4500 I105.4@2040,4500
BATT+301: Batt301.1 C315.2 C316.2 R311.2 R314.1 REG304.4 TP307.1
BATTEN301: REG304.1 TP309.1 U301.26
BATTERY_SENSE_201: 
BATTERYSENSE_101: I103.1 U101.19 | length 246.6
  Bottom Layer w10: I103.1@5420,7200 5420,7245 5460,7285 U101.19@5460,7430
BATTERYSENSE_101B: C110.2 C111.2 C114.2 C115.2 I106.1 L102.1 L103.1 PWR101.3 PWR101.6 PWR101.7 PWR102.6 PWR102.7 TP117.1 Valve101.6 | length 3948.6
  Top Layer w10: L102.1@2695,8100 L102.1@2767.8,8100 2790,8077.8 2790,7855.67 PWR101.7@2785.59,7851.26 2785.59,7809.41 2795,7800 2805,7800 2811.18,7806.18 PWR101.6@2811.18,7851.26 ; v1(2770,7515) 2797.6,7515 ; PWR101.3@2811.18,7680 2811.18,7591.42 C110.2@2842.6,7560
  Top Layer w30: C111.2@2842.6,7443.94 C110.2@2842.6,7560
  Top Layer w40: Valve101.6@1840,7797.01 Valve101.6@1840.55,7796.46 ; TP117.1@2560,8160 TP117.1@2580,8140 ; v1(2723.94,7996.06) 2723.94,8056.14 L102.1@2767.8,8100 ; 2797.6,7515 C110.2@2842.6,7560
  Top Layer w50: Valve101.6@1840,7797.01 I106.1@1840,8160 TP117.1@2560,8160 ; TP117.1@2580,8140 2655,8140 L102.1@2695,8100
  Bottom Layer w10: 2580.59,7589.41 PWR102.7@2580.59,7638.74 ; 2606.18,7565.97 PWR102.6@2606.18,7638.74
  Bottom Layer w20: 2580.59,7589.41 2642.8,7527.2
  Bottom Layer w40: Valve101.6@1840.55,7796.46 Valve101.6@1878.54,7796.46 ; 2642.8,7342.8 2642.8,7527.2 ; L103.1@2642.8,7457.8 2700,7515 v1(2770,7515) ; v1(2723.94,7996.06) 2806.54,7996.06 C115.2@2806.54,7900
  Bottom Layer w50: Valve101.6@1878.54,7796.46 2425,7250 2550,7250 2642.8,7342.8
BATTSENSE301: R311.1 R313.2 TP308.1 U301.22
COLOUR_EN_201: 
COLOUR_EN_201A: I212.1 Reg201.5 | length 145.1
  Bottom Layer w10: I212.1@2380,5700 2392.28,5712.28 Reg201.5@2392.28,5840
DATA201: 
DATA201A: I205.1 U203.4 | length 301.3
  Bottom Layer w10: I205.1@1520,6160 1515,6155 1515,5980.5 1540.5,5955 1569.5,5955 1579.5,5945 U203.4@1620,5945
DATA202: 
DATA202A: I206.1 U203.7 | length 90
  Bottom Layer w10: U203.7@1620,5870 I206.1@1710,5870
DATA203: 
DATA203A: I207.1 U203.9 | length 68.1
  Bottom Layer w10: I207.1@1400,5780 1407.4,5787.4 U203.9@1407.4,5845
DATA204: 
DATA204A: I208.1 U203.12 | length 115.7
  Bottom Layer w10: I208.1@1300,5900 1320,5920 U203.12@1407.4,5920
DATA_SELECT_201: 
DATA_SELECT_201A: I203.1 U202.1 | length 80
  Bottom Layer w10: U202.1@1640,5500 I203.1@1640,5580
DATA_SELECT_202: 
DATA_SELECT_202A: I204.1 U203.1 | length 156.6
  Bottom Layer w10: U203.1@1620,6020 1620,6075 1660,6115 I204.1@1660,6160
EL_CONTROL_201: 
G_CONTROL_101: I109.2 I110.1 R103.1 | length 1388.8
  Top Layer w15: I109.2@1660,4756.85 1660,4705 1695,4670 1755,4670 1795,4630 2260,4630 2300,4670 2330,4670 v1@2347.5,4687.5 ; v1(2257.4,4272.4) R103.1@2257.4,4340 ; v1(2360,4675) I110.1@2360,4754.33 ; I110.1@2362.52,4754.33 I110.1@2362.52,4756.85
  Bottom Layer w15: v1(2257.4,4272.4) 2360,4375 v1(2360,4675)
G_CONTROL_101L: I112.1 LED101.4 LED102.4 LED103.4 LED104.4 | length 4302.6
  Top Layer w20: v1(1627.7,2200.66) 1627.7,2306.6 ; v1(2205.66,3167.3) LED102.4@2311.6,3167.3 ; LED101.4@2478.4,1622.7 v1(2584.34,1622.7) ; 3167.3,2483.4 v1(3167.3,2589.34)
  Bottom Layer w20: I112.1@1648.73,2048.73 1648.73,2134.69 cw(c2396.34,2390) v1(2584.34,1622.7)
G_CONTROL_101R: I114.1 LED105.4 LED106.4 LED107.4 LED108.4 | length 4723.7
  Top Layer w20: LED105.4@3540.47,2478.9 3540.47,2570.47 v1(3580,2610) ; v1(4190,1580) 4260,1510 LED106.4@4321.1,1510 ; LED108.4@4473.9,3249.53 4565.47,3249.53 v1(4605,3210) ; v1(5220,2195) 5259.53,2234.53 LED107.4@5259.53,2326.1
  Bottom Layer w10: v1@4165,1580 v1(4190,1580)
  Bottom Layer w20: v1@3569.29,2610.19 cw(c4391.6,2395) v1@4191.33,1568.93 ; I114.1@4090,1655 v1@4165,1580
G_PWM_101: I131.1 U101.1 | length 254.2
  Bottom Layer w10: I131.1@5185,7960 5220,7925 5220,7833.15 U101.1@5299.76,7753.39
G_PWM_101A: I105.1 MOS101.2 R108.2 TP101.1 | length 1008.8
  Top Layer w10: 1993.46,4220 2020,4220 2080,4160 MOS101.2@2140,4160
  Top Layer w40: I105.1@1882.52,4696.85 v1(1882.52,4762.48) ; R108.2@1993.46,4160 1993.46,4220 1993.46,4256.54 1960,4290 TP101.1@1960,4360 2015,4360 v1(2070,4415)
  Bottom Layer w40: v1(1882.52,4762.48) 2070,4575 v1(2070,4415)
GND101: C101.1 C102.1 C103.1 C104.1 C105.1 C106.1 C107.1 C108.1 C109.1 C126.1 C127.1 C128.1 I101.1 I104.1 ISP101.6 MOS103.3 MOS103.6 MOS104.3 MOS104.6 MOS105.3 MOS105.6 MOS106.3 MOS106.6 MOS107.3 OptRx101.3 OptTx101.3 R112.1 R113.1 R114.1 R119.1 R120.1 R121.1 R125.1 R126.1 R127.1 S101.2 TP121.1 TP122.1 TP123.1 U101.3 U101.5 U101.21 | length 4498.7
  Top Layer w10: R120.1@4610,7780 4610,7715 4625,7700 MOS105.3@4645,7700 ; MOS105.3@4645,7695 4645,7682.94 4656.72,7671.22 4663.91,7671.22 4685,7650.13 MOS105.6@4685,7633.07 4706.93,7633.07 4720,7620 R119.1@4720,7545 ; R113.1@4810,7166.54 4876.54,7166.54 4890,7180 MOS103.3@4890,7200 4907.06,7200 4928.15,7221.09 4928.15,7228.28 4939.87,7240 MOS103.6@4955,7240 ; MOS103.6@4960,7240 4960,7265 4968.46,7273.46 R121.1@5030,7273.46 ; R112.1@5360,7161.54 5416.54,7161.54 5435,7180 MOS104.6@5435,7195 ; MOS104.6@5433.07,7195 MOS104.6@5435,7195 ; MOS104.3@5495,7235 5482.94,7235 5471.22,7223.28 5471.22,7216.09 5450.13,7195 MOS104.6@5435,7195 ; 5505,7240 5505,7255 5518.46,7268.46 R114.1@5580,7268.46 ; R127.1@5920,7166.54 5976.54,7166.54 5990,7180 MOS106.3@5990,7195 6007.06,7195 6018.78,7206.72 6018.78,7223.78 6030,7235 MOS106.6@6055,7235 ; 5930,7690 5950,7690 5958.46,7681.54 R126.1@5958.46,7610 ; 6055,7240 6055,7260 6068.46,7273.46 R125.1@6140,7273.46 ; I101.1@6380,7360 S101.2@6380,7525
  Top Layer w25: v1@6273.9,7538.9 S101.2@6380,7538.9
  Bottom Layer w10: C127.1@4660,7720 4665.04,7725.04 OptRx101.3@4665.04,7800 4665.04,7929.96 4665,7930 OptTx101.3@4665.04,7940 4665,7995 4705,8035 C126.1@4705,8055 ; 5310,7875 5320,7865 ; v1(5310,7975) v1@5310,7980 ; v1@5368.07,8150 v1@5376.54,8141.54 ; C104.1@5375,7855 5375,7825 5362.76,7812.76 U101.3@5362.76,7753.39 5362.76,7717.24 5380,7700 5415,7700 5425,7710 U101.5@5425,7740 ; C104.1@5376.54,7876.54 C106.1@5376.54,7970 ; C107.1@5380,7355 5380,7375 5394.25,7389.25 U101.21@5394.25,7426.61 ; U101.21@5395,7445 5395,7700 ; C128.1@5505,7185 C128.1@5510,7180 ; v1(5687.5,8120) v1@5690,8120 ; v1@6265,7455 v1(6265,7460) ; v1@6265,7520 v1(6265,7525)
  Bottom Layer w25: v1(4495,8115) v1(4495,7960) v1(4570,7960) ; v1@4575,7960 4595,7940 OptTx101.3@4665.04,7940 ; C127.1@4660,7720 C102.1@4770,7720 ; C126.1@4700,8065 v1(4700,8145) ; C102.1@4775,7718.46 v1@4840,7718.46 ; v1@5300,8150 v1@5368.07,8150 ; 5310,7875 v1(5310,7910) v1(5310,7975) C106.1@5365,7975 ; 5320,7865 C104.1@5375,7865 ; v1(5370,7090) 5405,7090 v1@5425,7110 ; C106.1@5376.54,7970 C105.1@5376.54,8048.46 ; C105.1@5376.54,8050 v1@5376.54,8141.54 ; v1@5415,7110 v1@5425,7110 ; C128.1@5505,7185 C108.1@5505,7251.54 ; C128.1@5511.54,7185 5511.54,7116.54 5505,7110 v1(5430,7110) v1@5425,7110 ; C101.1@5613.46,8120 v1(5687.5,8120) ; v1@5693.46,8120 v1(5767.5,8120) v1(5847.5,8120) C103.1@5925,8120 ; ISP101.6@6140,7520 6265,7520 v1(6265,7460) ; v1(6265,7525) v1(6265,7590)
  other v1: 4845,7715 4495,8050 5290,8150 5355,8150
GND101A: C122.1 C123.1 C124.1 C125.1 I105.3 MOS101.3 MOS101.6 MOS102.3 MOS102.6 MOS108.3 R108.1 R109.1 R110.1 R111.1 TP120.1 | length 4822.4
  Top Layer w10: v1(1665,4440) MOS102.3@1740,4440 ; 1780,4306.54 MOS102.6@1780,4373.07 ; I105.3@2040,4696.85 v1(2040,4765) ; 2060,4140 MOS101.3@2140,4140 ; MOS101.6@2206.93,4180 v1(2206.93,4223.07)
  Top Layer w20: R110.1@1753.46,4280 1780,4306.54 ; 2006.54,4086.54 2060,4140 ; v1(2530,4675) 2543.46,4661.54 C122.1@2690,4661.54 C123.1@2790,4661.54
  Top Layer w30: 1780,4306.54 v1@1826.54,4306.54
  Top Layer w40: C125.1@1240,4666.54 C124.1@1360,4666.54 ; TP120.1@1360,4560 C124.1@1360,4666.54 ; v1@1486.54,4666.54 C124.1@1360,4666.54 ; v1@1826.54,4306.54 v1(1830,4310) ; v1(1845,4185) 1870,4160 R108.1@1926.54,4160 1926.54,4093.46 1980,4040 R109.1@2006.54,4040 2006.54,4086.54
  Bottom Layer w10: v1@1660,4445 v1(1665,4440) ; 2055,4165 MOS108.3@2070,4165
  Bottom Layer w20: 1605,4190 1640,4155 1640,4043.43 ; 1990,4230 2055,4165 ; v1(2040,4765) 2405,4765 2455,4715 2455,4675 ; v1(2206.93,4223.07) 2271.93,4223.07 2455,4406.14 2455,4675 ; v1(2530,4675) 2455,4675 ; 2795,4610 2850,4665 2850,4675
  Bottom Layer w40: v1@1501.48,4675 1665,4511.48 ; v1(1665,4440) 1665,4511.48 ; R111.1@1910,4091.54 1868.46,4091.54 1845,4115 v1(1845,4185) 1830,4200 v1(1830,4310) 1915,4395 1935,4395 ; 1990,4230 1990,4340 ; v1(2040,4765) 2160,4645 2160,4380 2120,4340 1990,4340 ; 1665,4511.48 1898.52,4511.48 1935,4475 1935,4395 ; 1935,4395 1990,4340
  other v1: 1495,4675
GND101B: C110.1 C111.1 C112.1 C113.1 C114.1 C115.1 C116.1 C117.1 C118.1 C119.1 C120.1 C121.1 I122.1 PWR101.4 PWR102.4 R132.1 R134.1 TP124.1 Valve103.1 | length 4693.3
  Top Layer w10: PWR101.4@2843.66,7680 2890,7680
  Top Layer w30: v4(2160,7815) Valve103.1@2160,7677.48 2252.52,7677.48 2270,7660 I122.1@2340,7660 ; C118.1@2606.54,7940 R132.1@2606.54,7740 2540,7740 2460,7660 I122.1@2340,7660 ; 2611.54,7825 v1(2685,7825) ; 2890,7680 2917.4,7652.6 C110.1@2917.4,7560 C111.1@2917.4,7443.94 ; C113.1@3180,7562.6 C112.1@3080,7562.6 TP124.1@3080,7440 C111.1@2913.46,7440 2913.46,7388.46 2831.54,7306.54 C119.1@2680,7306.54 2393.46,7306.54 2340,7360 I122.1@2340,7660
  Bottom Layer w10: PWR102.4@2631.77,7810 2670,7810 v1(2685,7825)
  Bottom Layer w30: C120.1@2475,7376.54 2423.46,7376.54 2405,7395 2405,7570 v4(2160,7815) 2160,8075 2228.46,8143.46 C121.1@2555,8143.46 2691.54,8143.46 2708.46,8126.54 R134.1@2708.46,8090 2855,8090 2873.46,8071.54 C115.1@2873.46,7900 C116.1@2967.6,7900 ; v1@2670,7810 v1@2680,7820 ; C117.1@2977.6,7770 C116.1@2977.6,7910
GND201: 